# Altium PCB IS25LP128_Breakout_PCB.PcbDoc
Units mil, origin at the board's own origin, x right, y up, seen from the top; angles counter-clockwise.
Board outline 620 x 690 mil, 2 copper layers (Top Layer, Bottom Layer); 5 components, 8 nets, 20 pads, 0 vias.
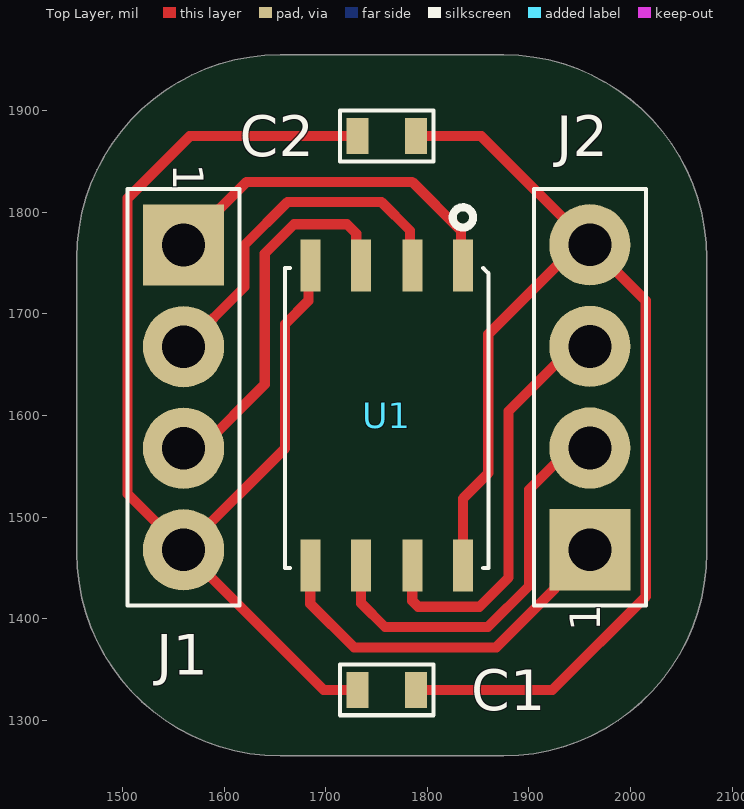
[diagram p0: Top Layer view]
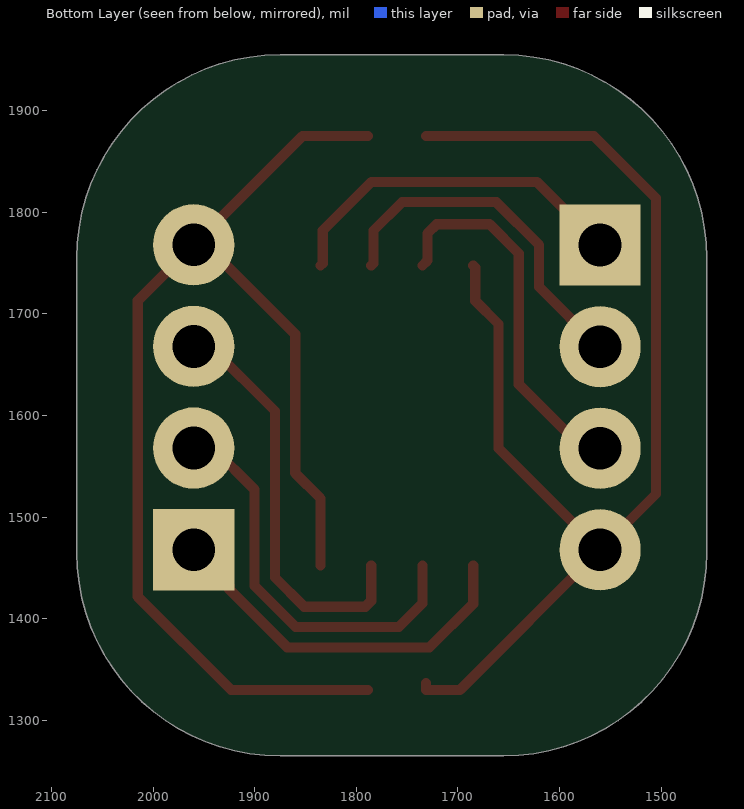
[diagram p1: Bottom Layer view, seen from below]
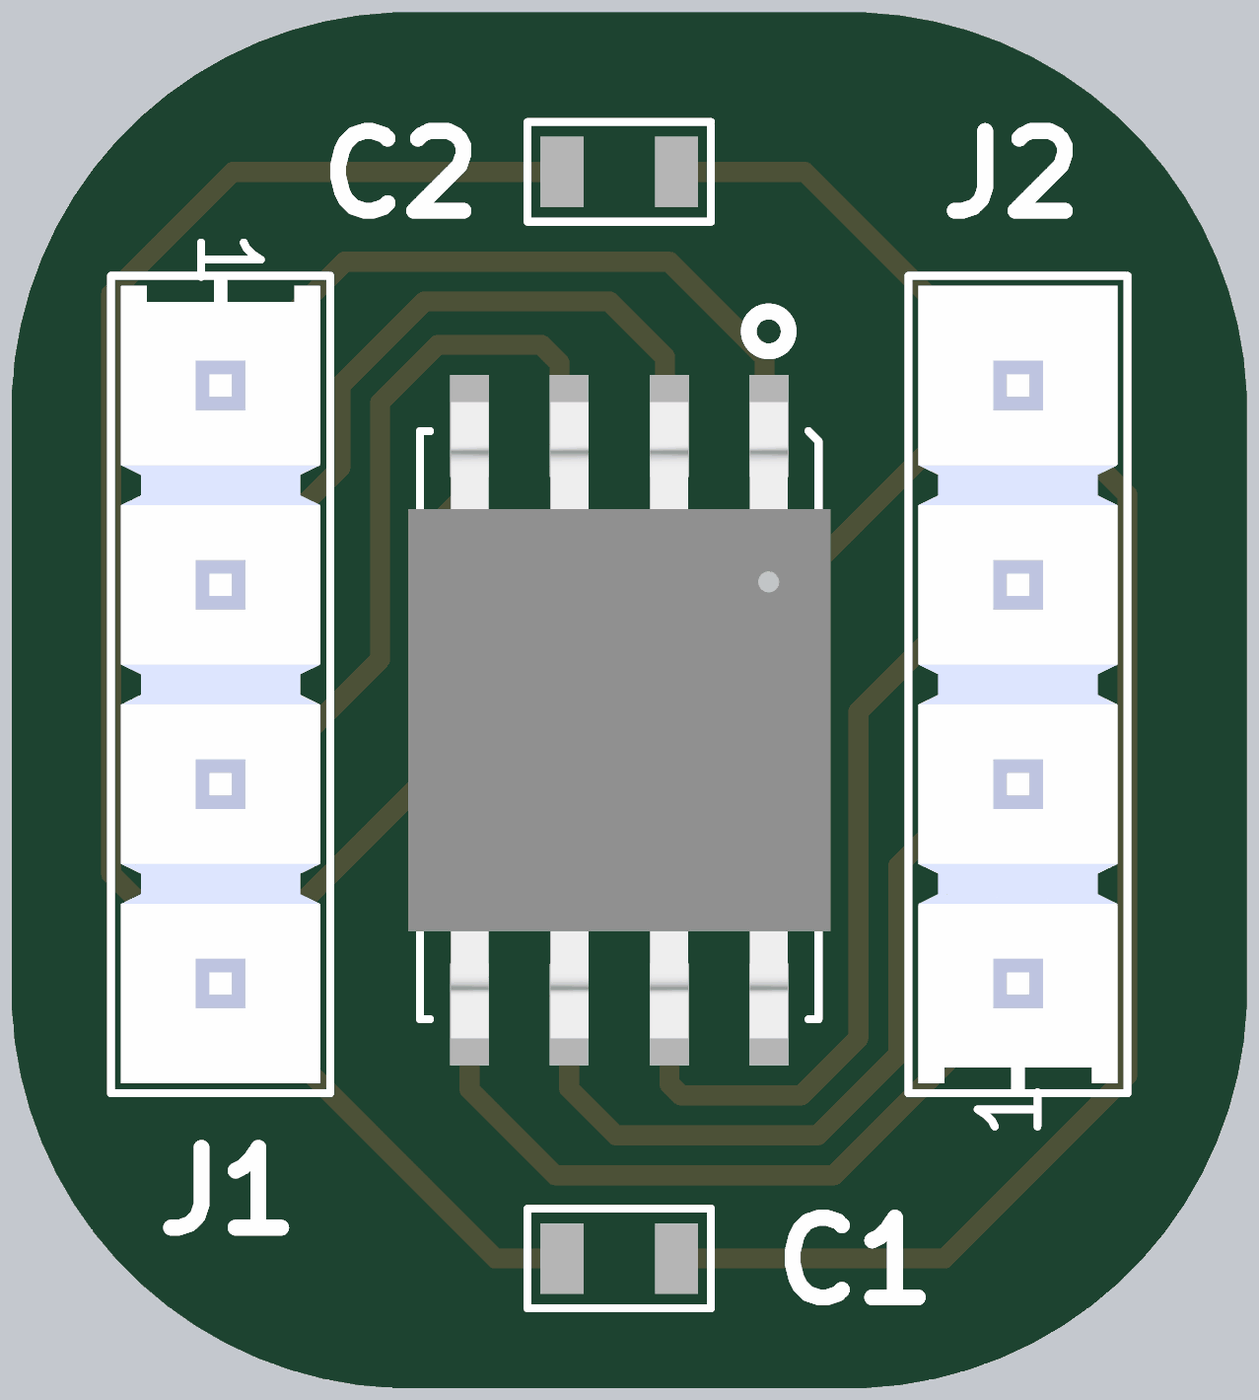
[diagram p2: 3D render of the assembled board from above, using the file's embedded part models]

## Layer stack, top to bottom
Top Solder: solder mask 0.4, Solder Resist, Dk 3.5
Top Layer: signal copper 1.4
Dielectric 1: dielectric 12.6, FR-4, Dk 4.8
Bottom Layer: signal copper 1.4
Bottom Solder: solder mask 0.4, Solder Resist, Dk 3.5

## Board outline
1455,1465 1455,1755 cw(c1655,1755) 1655,1955 1875,1955 cw(c1875,1755) 2075,1755 2075,1465 cw(c1875,1465) 1875,1265 1655,1265 cw(c1655,1465)

## Design rules (kind name [scope] priority, off if disabled: settings)
Clearance [All] p1: gap=10 ignorepadtopadclearanceinfootprint=FALSE except(0: Arc-Hole Track-Hole SMDPad-Hole THPad-Hole Via-Hole Fill-Hole Poly-Hole Region-Hole Text-Hole)
PolygonConnect [All] p1: connectstyle=Relief reliefconductorwidth=10 reliefentries=4 polygonreliefangle="90 Angle" airgapwidth=10
RoutingVias [All] p1: holewidth=28 width=50 viastyle="Through Hole" minholewidth=28 minwidth=50 maxholewidth=28 maxwidth=50
SolderMaskExpansion [All] p1: expansion=4 istentingtop=FALSE
Width [All] p1: maxlimit=10 minlimit=10 preferedwidth=10
30 further rules are at their usual default settings.

## Components (designator, comment, footprint, x,y, rotation, side; value= is the part's Value field where it differs from the comment)
C1 "0.1uF" 0603 1760,1330 r180 top
C2 "0.1uF" 0603 1760,1875 r180 top
J1 "CON_004pin_1x4" CON-004-100-400X100/1X4-POST 1559.9,1767.89 r270 top
J2 "CON_004pin_1x4" CON-004-100-400X100/1X4-POST 1960.1,1467.89 r90 top
U1 "IC_IS25LP128" GW-08-1.27-5.2X8.0 1760,1600 r180 top

## Footprints (in the part's own frame and the unit in brackets; to place one, negate y for a bottom-side part, rotate by r counter-clockwise, add the part's x,y. Pads: shape width x height; smd on the part's side, far side on the other; paste and mask are expansions set on the pad)
0603 [mm]
  rect 0.55x0.9 smd mask+0: 1(-0.73,0) 2(0.73,0)
  silkscreen extent -1.17,-0.64 1.17,0.64, body extent -0.76,-0.38 0.76,0.38, height 0.79
CON-004-100-400X100/1X4-POST [mil]
  rect 80x80 hole 42 mask+0: 1(0.1,0.1)
  round 80 hole 42 mask+0: 2(100.1,0.1) 3(200.1,0.1) 4(300.1,0.1)
  silkscreen extent -55,-55 355,55, body extent -55,-50 350,50, height 330
GW-08-1.27-5.2X8.0 [mm]
  rect 0.5x1.3 smd mask+0: 1(-1.91,-3.75) 2(-0.64,-3.75) 3(0.64,-3.75) 4(1.91,-3.75) 5(1.91,3.75) 6(0.64,3.75) 7(-0.64,3.75) 8(-1.91,3.75)
  silkscreen extent -2.54,-5.21 2.54,3.81, body extent -2.69,-4.05 2.69,4.05, height 2.16

## Part data
C1 C2: library part DISCRETE_C, "Capacitor generic"
J1 J2: "Con 4 pins 1x4"

## Nets (pads, with @x,y where several pads share a name; then routed paths per layer and width w, separated by ;. In a path a pad name is that pad's centre, name@x,y a point inside that pad or via, vN(x,y) a via of type N, cw(c..) or ccw(c..) an arc to the next point about the centre after c; other vN are vias at no path point)
CE#: J1.1 U1.1 | length 353.9
  Top Layer w10: J1.1 1622.21,1830 1785,1830 1832.96,1782.04 1832.96,1749.88 U1.1
GND: C1.2 C2.2 J1.4 U1.4 | length 1187.3
  Top Layer w10: U1.4 1682.91,1745.74 1682.91,1712.91 1660,1690 1660,1567.79 J1.4 ; C1.2@1731.26,1336.89 C1.2 1697.79,1330 J1.4 ; C2.2 1566,1875 1505,1814 1505,1522.79 J1.4
HOLD#: J2.3 U1.7 | length 414.1
  Top Layer w10: U1.7 1785.2,1417.63 1791.05,1411.77 1851.25,1411.77 1880,1440.52 1880,1604.39 1943.6,1667.99 J2.3
SCK: J2.2 U1.6 | length 400.5
  Top Layer w10: U1.6 1734.8,1415.2 1758.23,1391.77 1859.54,1391.77 1900,1432.23 1900,1526.93 1941.06,1567.99 J2.2
SI: J2.1 U1.5 | length 372.8
  Top Layer w10: U1.5 1684.8,1414.8 1727.83,1371.77 1867.82,1371.77 1925,1428.95 1925,1432.99 J2.1
SO: J1.2 U1.2 | length 352.9
  Top Layer w10: J1.2 1561.21,1667.79 1620,1726.57 1620,1767.77 1662.23,1810 1755,1810 1782.96,1782.04 1782.96,1749.88 U1.2
VCC: C1.1 C2.1 J2.4 U1.8 | length 1223.2
  Top Layer w10: C1.1 1923.23,1330 2015,1421.77 2015,1712.99 J2.4 ; C2.1 1852.99,1875 J2.4 ; U1.8 1835.2,1518.48 1860,1543.28 1860,1680 1947.99,1767.99 J2.4
WP#: J1.3 U1.3 | length 374
  Top Layer w10: J1.3 1577.17,1567.79 1640,1630.61 1640,1759.48 1668.75,1788.23 1720.87,1788.23 1729.96,1779.14 1729.96,1752.48 U1.3

## Text inside footprints (layer, text, board x,y; h text height)
J1: Top Overlay "1" at 1549.9,1847.89 h30 r270
J2: Top Overlay "1" at 1970.1,1387.89 h30 r90